# Altium PCB PCB1.PcbDoc
Units mm, origin at the board's own origin, x right, y up, seen from the top; angles counter-clockwise.
Board outline 121.03 x 115.95 mm, 2 copper layers (Top Layer, Bottom Layer); 55 components, 59 nets, 238 pads, 36 vias.
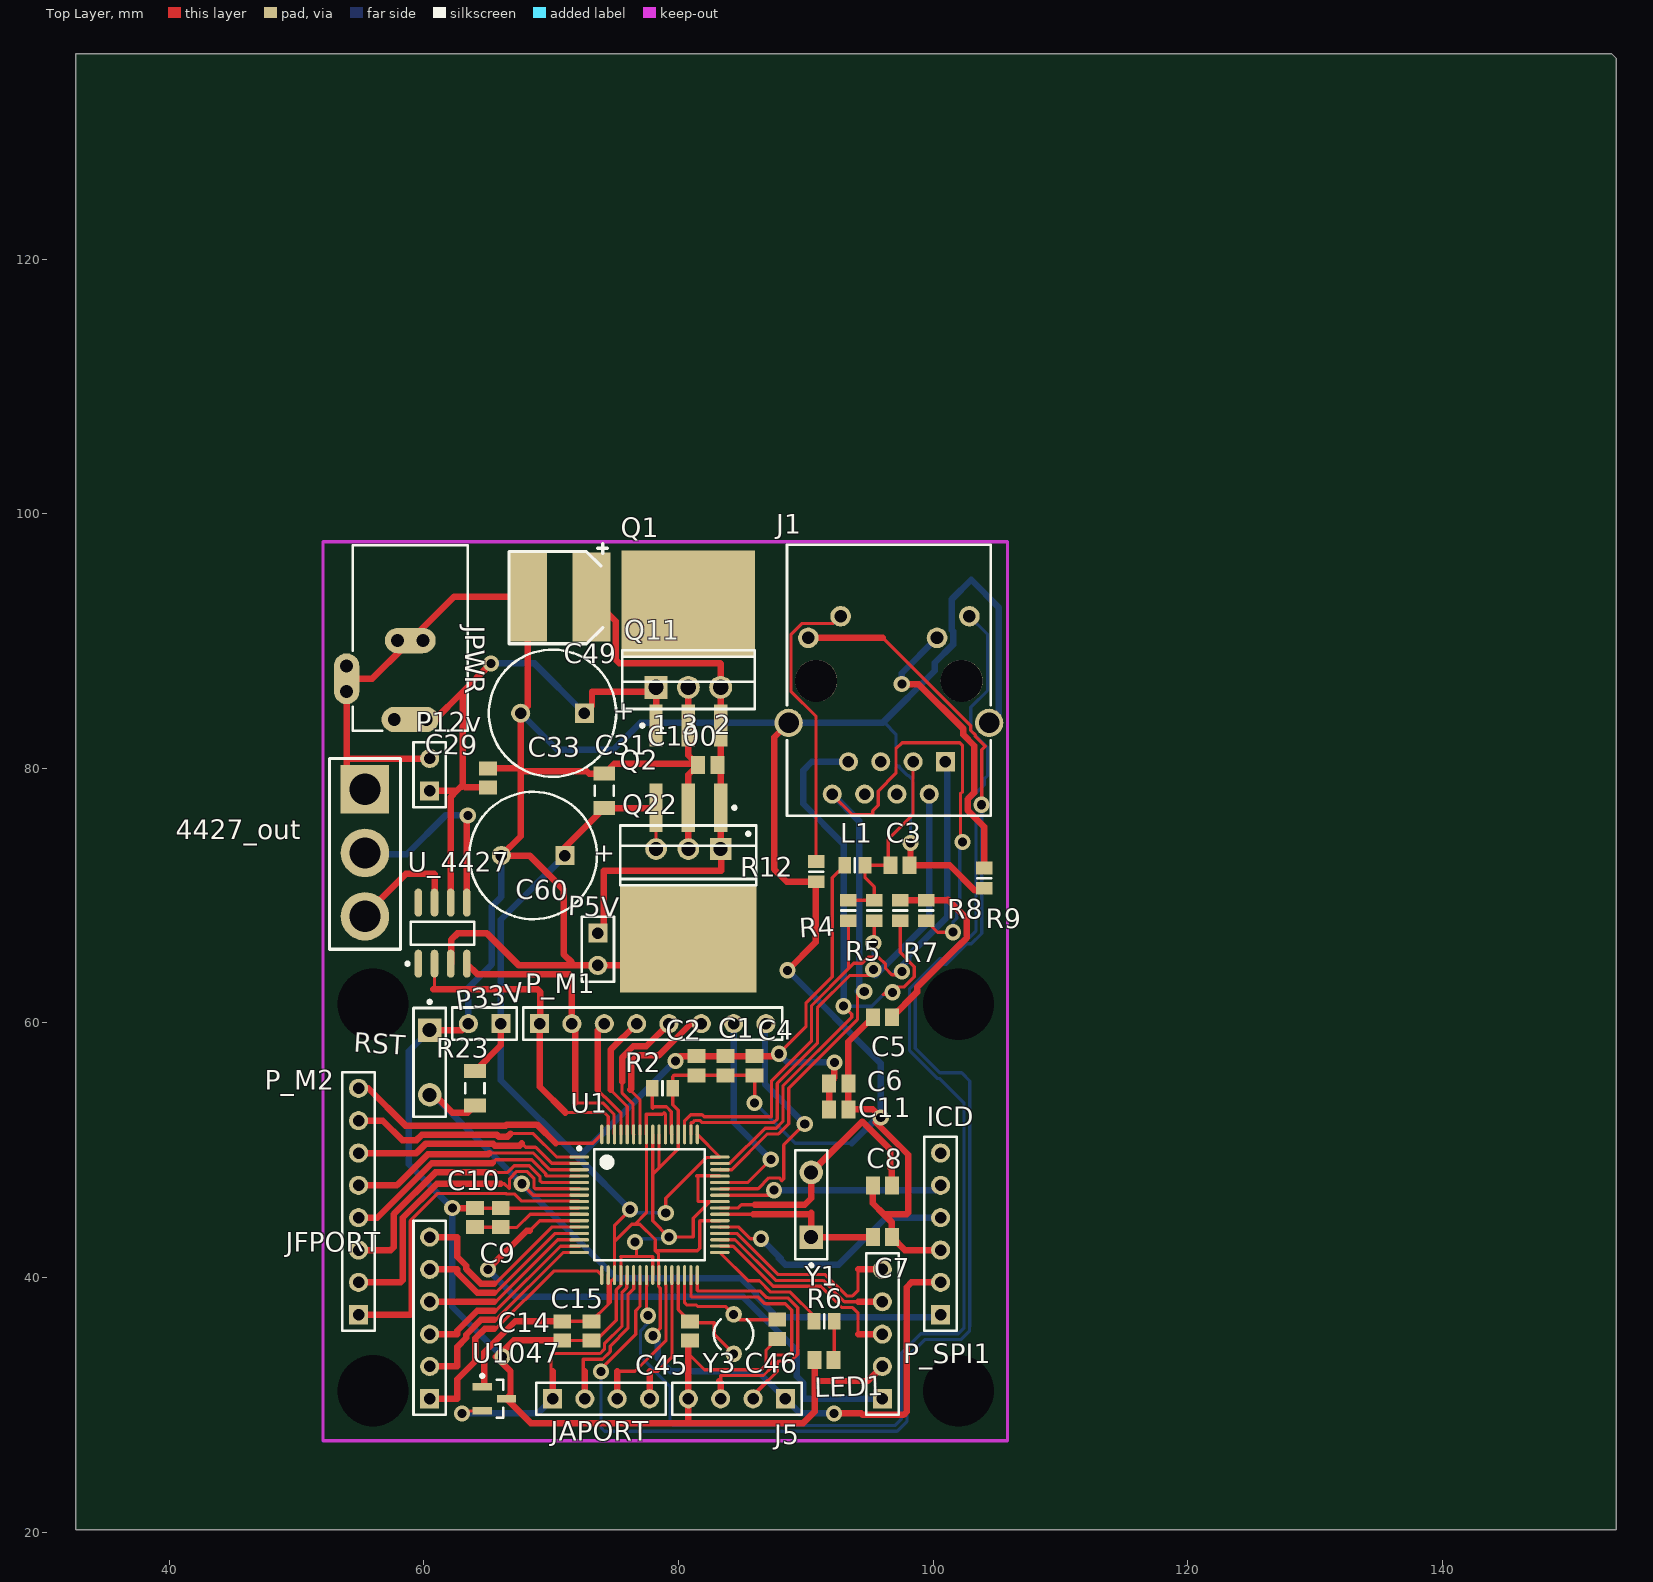
[diagram p0: Top Layer view]
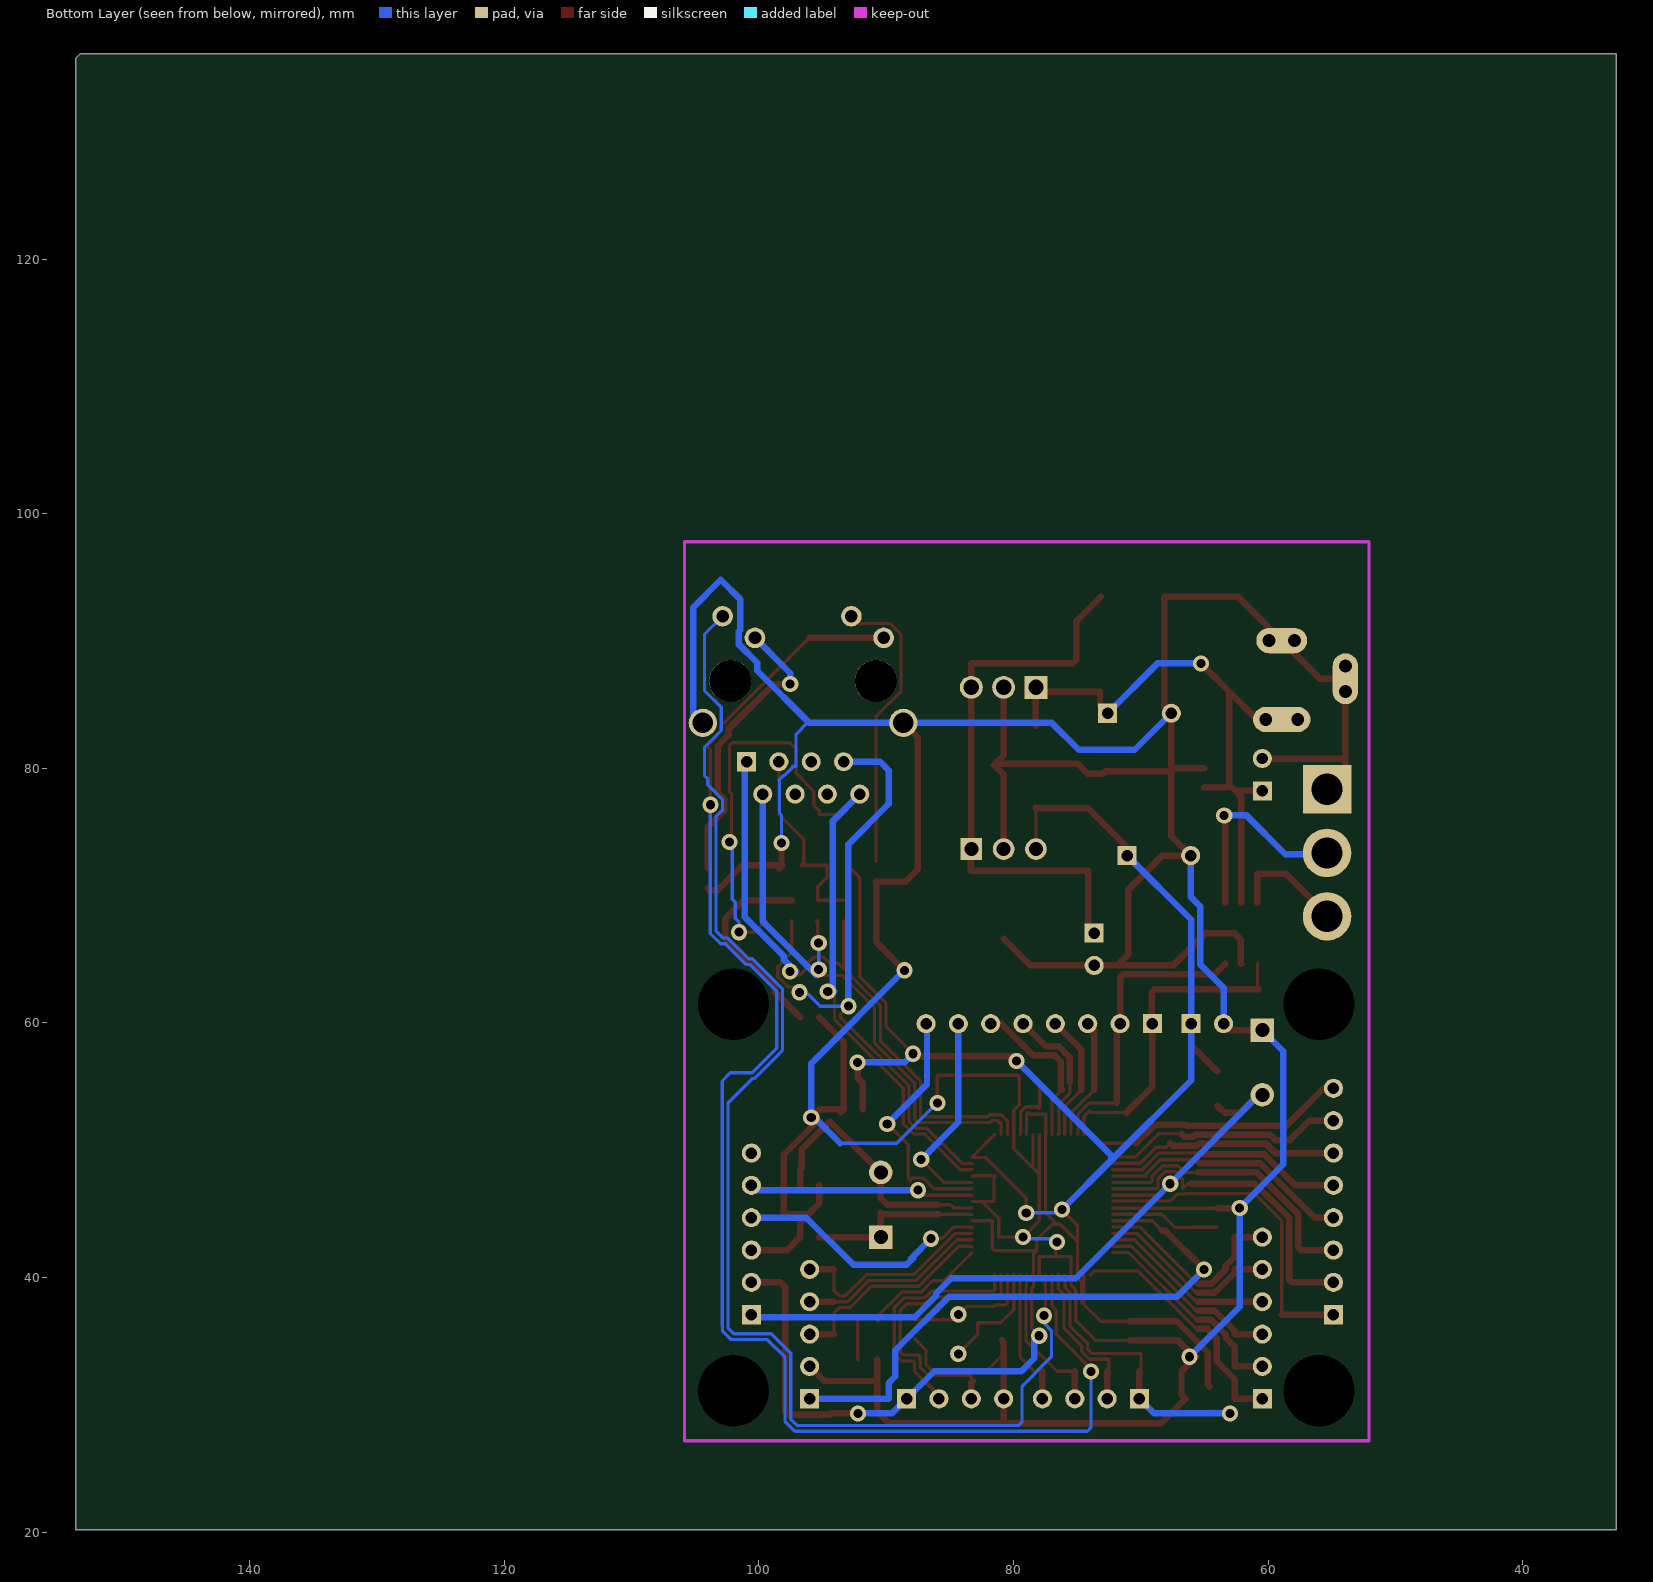
[diagram p1: Bottom Layer view, seen from below]

## Layer stack, top to bottom
Top Layer: signal copper 0.0356
Dielectric: dielectric 0.32, FR-4, Dk 4.8
Bottom Layer: signal copper 0.0356

## Board outline
32.639,136.144 32.639,20.193 153.67,20.193 153.67,135.763 153.289,136.144

## Design rules (kind name [scope] priority, off if disabled: settings)
AssemblyTestPointUsage [All] p1 off:
AssemblyTestpoint [All] p1 off: testpointundercomponent=TRUE minsize=1.016 maxsize=2.54 preferedsize=1.524 minholesize=0 maxholesize=1.016 preferedholesize=0.813 testpointgrid=0.025 usegrid=TRUE gridtolerance=0 allowsidetop=TRUE allowsidebottom=TRUE
Clearance [All] p1: gap=0.198
ComponentClearance [All] p1: gap=0.025 collisioncheckmode=3 verticalgap=0.025 showdistances=FALSE
FabricationTestPointUsage [All] p1 off: valid=0 allowmultiple=FALSE
FabricationTestpoint [All] p1 off: side=3 testpointundercomponent=TRUE minsize=1.016 maxsize=2.54 preferedsize=1.524 minholesize=0 maxholesize=1.016 preferedholesize=0.813 testpointgrid=0.025 allowsidetop=TRUE allowsidebottom=TRUE usegrid=TRUE gridtolerance=0
HoleSize [All] p1: absolutevalues=TRUE maxlimit=5.08 minlimit=0.025 maxpercent=80.000 minpercent=20.000
MinimumSolderMaskSliver [All] p1: minsoldermaskwidth=0.178
PolygonConnect [All] p1: connectstyle=Relief reliefconductorwidth=0.254 reliefentries=4 polygonreliefangle="90 Angle"
RoomDefinition Sheet_MAGJACK [InComponentClass('Sheet_MAGJACK')] p1: confinementstyle=ConfineIn formatcopy=TRUE lockcomponents=FALSE outline 116.84,95.631 121.412,95.631 121.412,104.267 116.84,104.267
RoomDefinition Sheet1 [InComponentClass('Sheet1')] p2: confinementstyle=ConfineIn formatcopy=TRUE lockcomponents=FALSE outline 115.189,38.989 122.301,38.989 122.301,53.721 115.189,53.721
RoutingVias [All] p1: holewidth=0.711 width=1.27 viastyle="Through Hole" minholewidth=0.711 minwidth=1.27 maxholewidth=0.711 maxwidth=1.27
SMDNeckDown [All] p1: percent=105.000
SilkToSilkClearance [All] p1 off: silktosilkclearance=0.254
SilkscreenOverComponentPads [All] p1: minsilkscreentomaskgap=0.254
SolderMaskExpansion [All] p1: expansion=0.102
Width [All] p1: maxlimit=0.508 minlimit=0.254 preferedwidth=0.305
19 further rules are at their usual default settings.

## Classes and differential pairs
component class Sheet1: C1 C2 C4 C6 C7 C8 C9 C10 C11 C14 C15 C45 C46 ICD J5 P_SPI1 R2 R23 RST U1 Y1 Y3
component class Sheet_MAGJACK: 4427_out C3 C5 C29 C31 C33 C49 C60 C100 J1 JAPORT JFPORT JPWR L1 LED1 P5V P12v P33V P_M1 P_M2 Q1 Q2 Q11 Q22 R4 R5 R6 R7 R8 R9 R12 U1047 U_4427

## Components (designator, comment, footprint, x,y, rotation, side; value= is the part's Value field where it differs from the comment)
4427_out "Header 3" BIG4 55.372,77.978 r90 top
C1 "0.1uF" CAPC2012L 83.693,56.642 r90 top
C2 "0.1uF" CAPC2012L 81.407,56.642 r90 top
C3 "0.1uF" CAPC2012L 97.409,72.39 r0 top
C4 "0.1uF" CAPC2012L 85.979,56.642 r90 top
C5 "0.1uF" CAPC2012L 96.012,60.452 r0 top
C6 "0.1uF" CAPC2012L 92.583,55.245 r180 top
C7 "33pF" CAPC2012L 96.012,43.18 r180 top
C8 "33pF" CAPC2012L 96.012,47.244 r0 top
C9 "1uF" CAPC2012L 66.04,44.704 r270 top
C10 "0.1uF" CAPC2012L 64.008,44.704 r270 top
C11 "0.1uF" CAPC2012L 92.583,53.213 r180 top
C14 "0.1uF" CAPC2012L 70.866,35.814 r90 top
C15 "0.1uF" CAPC2012L 73.152,35.814 r90 top
C29 "0.1uF" CAPC2012L 65.024,79.248 r270 top
C31 "2.2uF" CAPC3216L 74.168,78.232 r270 top
C33 "220mF" CAPPR5-10x12.5 70.104,84.328 r180 top
C45 "22pF" CAPC2012L 80.899,35.814 r90 top
C46 "22pF" CAPC2012L 87.757,35.941 r90 top
C49 "47uF" NSOALUMB 73.152,93.472 r180 top
C60 "220mF" CAPPR5-10x12.5 68.58,73.152 r180 top
C100 "0.1uF" CAPC2012L 82.296,80.264 r0 top
ICD "Header 6" HDR1X6 100.584,37.084 r90 top
J1 "LU1T516-43LF" CON_RJ45_RA_LEDS 96.52,86.868 r0 top
J5 "Header 4" HDR1X4 88.392,30.48 r180 top
JAPORT "Header 4" HDR1X4 70.104,30.48 r0 top
JFPORT "Header 6" HDR1X6 60.452,30.48 r90 top
JPWR "PWR2.5" KLD-0202 58.928,97.536 r270 top
L1 "330" RESC2012L 93.853,72.39 r0 top
LED1 "LED2" CAPC2012L 91.44,33.528 r180 top
P5V "Header 2" HDR1X2 73.66,67.056 r270 top
P12v "Header 2" HDR1X2 60.452,78.232 r90 top
P33V "Header 2" HDR1X2 66.04,59.944 r180 top
P_M1 "Header 8" HDR1X8 69.088,59.944 r0 top
P_M2 "Header 8" HDR1X8 54.864,37.084 r90 top
P_SPI1 "Header 5" HDR1X5 96.012,30.48 r90 top
Q1 "LM2940S-5.0" TS3B_N 80.772,89.408 r90 top
Q2 "TC1262-3.3VEB" DDPAK-EB3_N 80.772,70.612 r270 top
Q11 "L7805CP" ISOWATT220AB 80.772,86.36 r0 top
Q22 "TC1262-3.3VAB" TO-220-AB3 80.772,73.66 r180 top
R2 "2.26K 1%" RESC2012L 78.74,54.864 r180 top
R4 "49.9" RESC2012L 93.345,68.834 r270 top
R5 "49.9" RESC2012L 95.377,68.834 r270 top
R6 "180" RESC2012L 91.44,36.576 r0 top
R7 "49.9" RESC2012L 97.409,68.834 r270 top
R8 "49.9" RESC2012L 99.441,68.834 r270 top
R9 "180" RESC2012L 104.013,71.374 r90 top
R12 "180" RESC2012L 90.805,71.882 r270 top
R23 "10K" RESC3216L 64.008,54.864 r90 top
RST "SW-PB" SPST-2 60.452,56.896 r270 top
U1 "PIC18F67J60-I/PT" TQFP-PT64_L 77.724,45.72 r0 top
U1047 "TC1047AVNBTR" SOT-23-NB3_N 65.532,30.48 r0 top
U_4427 "TC4427AEOA" SOIC-OA8_N 61.468,67.056 r90 top
Y1 "25MHz" SPST-2 90.424,45.72 r90 top
Y3 "32KHz" BCY-W2/D3.1 84.328,35.56 r0 top

## Footprints (in the part's own frame and the unit in brackets; to place one, negate y for a bottom-side part, rotate by r counter-clockwise, add the part's x,y. Pads: shape width x height; smd on the part's side, far side on the other; paste and mask are expansions set on the pad)
BCY-W2/D3.1 [mm] "Crystal, Thru-Hole; 2 Leads; Body 3.1 x 8.2 mm (Dia.xH)"
  round 1.3 hole 0.7: 1(0,1.55) 2(0,-1.55)
  silkscreen extent -1.55,-1.19 1.55,1.17
BIG4 [mil]
  rect 150x150 hole 97: 1(15,0)
  round 150 hole 97: 2(-182,0) 3(-378,0)
  silkscreen extent -480,-110 110,110
CAPC2012L [mm] "Chip Capacitor, Body 2.0x1.3mm, IPC High Density"
  rect 1.1x1.4 smd: 1(-0.75,0) 2(0.75,0)
  body extent -1.1,-0.72 1.1,0.72, height 1.4
CAPC3216L [mm] "Chip Capacitor, Body 3.2x1.6mm, IPC High Density"
  rect 1.1x1.7 smd: 1(-1.35,0) 2(1.35,0)
  silkscreen extent -0.4,-0.75 0.4,0.75, body extent -1.7,-0.9 1.7,0.9, height 1.3
CAPPR5-10x12.5 [mm] "Capacitor, Electrolytic, Radial; Body 10 x 12.5 mm (Dia.xH typ); Pin Spacing 5 mm (typ)"
  rect 1.5x1.5 hole 0.9: 1(-2.5,0)
  round 1.5 hole 0.9: 2(2.5,0)
  silkscreen extent -5,-5 5,5
CON_RJ45_RA_LEDS [mm]
  rect 1.5x1.5 hole 0.9: 1(4.445,-6.35)
  round 1.5 hole 0.9: 2(3.175,-8.89) 3(1.905,-6.35) 4(0.635,-8.89) 5(-0.635,-6.35) 6(-1.905,-8.89) 7(-3.175,-6.35) 8(-4.445,-8.89)
  round 1.62 hole 1: 9(6.325,5.08) 10(3.785,3.38) 11(-3.785,5.08) 12(-6.325,3.38)
  round 2.23 hole 1.6: MH1(7.875,-3.3) MH2(-7.875,-3.3)
  round 3.3 hole 3.3 unplated: MH3(5.715,0) MH4(-5.715,0)
  silkscreen extent -8,-10.6 8,10.7
DDPAK-EB3_N [mm] "D2-PAK, 4-Leads, Body 9x10.2mm, Pitch 2.54mm, Lead Span 14.9mm, IPC Medium Density"
  rect 3.8x1.05 smd: 1(-6.3,2.54) 2(-6.3,0) 3(-6.3,-2.54)
  rect 8.4x10.7 smd: 4(4,0)
  silkscreen extent -6.42,-5.35 -0.6,5.35, body extent -3.3,-5.33 6.35,5.33, height 4.83
HDR1X2 [mm] "Connector; Header; 2 Position"
  rect 1.5x1.5 hole 0.9: 1(0,0)
  round 1.5 hole 0.9: 2(2.54,0)
  silkscreen extent -1.27,-1.27 3.81,1.27
HDR1X4 [mm] "Connector; Header; 4 Position"
  rect 1.5x1.5 hole 0.9: 1(0,0)
  round 1.5 hole 0.9: 2(2.54,0) 3(5.08,0) 4(7.62,0)
  silkscreen extent -1.27,-1.27 8.89,1.27
HDR1X5 [mm] "Connector; Header; 5 Position"
  rect 1.5x1.5 hole 0.9: 1(0,0)
  round 1.5 hole 0.9: 2(2.54,0) 3(5.08,0) 4(7.62,0) 5(10.16,0)
  silkscreen extent -1.27,-1.27 11.43,1.27
HDR1X6 [mm] "Connector; Header; 6 Position"
  rect 1.5x1.5 hole 0.9: 1(0,0)
  round 1.5 hole 0.9: 2(2.54,0) 3(5.08,0) 4(7.62,0) 5(10.16,0) 6(12.7,0)
  silkscreen extent -1.27,-1.27 13.97,1.27
HDR1X8 [mm] "Connector; Header; 8 Position"
  rect 1.5x1.5 hole 0.9: 1(0,0)
  round 1.5 hole 0.9: 2(2.54,0) 3(5.08,0) 4(7.62,0) 5(10.16,0) 6(12.7,0) 7(15.24,0) 8(17.78,0)
  silkscreen extent -1.27,-1.27 19.05,1.27
ISOWATT220AB [mm] "TO, Thru-Hole, Vertical, Heatsink Mounted; 3 In-Line Leads; Pitch 2.54 mm; Pin sequence 1, 3, 2"
  rect 1.8x1.8 hole 1.2: 1(-2.54,0)
  round 1.8 hole 1.2: 2(2.54,0) 3(0,0)
  silkscreen extent -5.2,-1.7 5.2,2.9
KLD-0202 [mm]
  oval 2x4.5 all layers, no hole: 1(13.7,0)
  round 1.5 hole 1: 1A(13.7,-1.25) 1B(13.7,1.25) 2A(7.5,-1) 2B(7.5,1) 3A(9.5,-5) 3B(11.5,-5)
  oval 2x4 all layers, no hole: 2(7.5,0)
  oval 4x2 all layers, no hole: 3(10.5,-5)
  silkscreen extent 0,-4.5 14.6,4.5
NSOALUMB [mm]
  rect 3x7 smd: 1(0,0) 2(5,0)
  silkscreen extent -1.27,-4.19 6.48,3.68
RESC2012L [mm] "Chip Resistor, Body 2.0x1.3mm, IPC High Density"
  rect 1x1.3 smd: 1(-0.8,0) 2(0.8,0)
  silkscreen extent 0,-0.55 0,0.55, body extent -1.07,-0.7 1.07,0.7, height 2.54
RESC3216L [mm] "Chip Resistor, Body 3.1x1.6mm, IPC High Density"
  rect 1.1x1.7 smd: 1(-1.35,0) 2(1.35,0)
  silkscreen extent -0.4,-0.75 0.4,0.75, body extent -1.68,-0.87 1.68,0.87, height 2.54
SOIC-OA8_N [mm] "SOIC, 8-Leads, Body 4.9x3.9mm, Pitch 1.27mm, IPC Medium Density"
  oval 2.2x0.6 smd: 1(-2.4,1.905) 2(-2.4,0.635) 3(-2.4,-0.635) 4(-2.4,-1.905) 5(2.4,-1.905) 6(2.4,-0.635) 7(2.4,0.635) 8(2.4,1.905)
  silkscreen extent -2.52,-2.5 0.9,2.88, body extent -2,-2.5 2,2.5, height 1.75
SOT-23-NB3_N [mm] "SOT23, 3-Leads, Body 2.9x1.3mm, Pitch 0.95mm, Lead Span 2.4mm, IPC Medium Density"
  rect 1.5x0.6 smd: 1(-0.95,0.95) 2(-0.95,-0.95) 3(0.95,0)
  silkscreen extent -1.07,-1.5 0.7,1.92, body extent -0.7,-1.5 0.7,1.5, height 1.12
SPST-2 [mm] "Circuit Breaker; 2 Leads"
  rect 1.85x1.85 hole 1.1: 1(-2.54,0)
  round 1.85 hole 1.1: 2(2.54,0)
  silkscreen extent -4.89,-1.27 4.28,1.27
TO-220-AB3 [mm] "TO, Thru-Hole, Vertical, Heatsink Mounted; 3 In-Line Leads; Pitch 2.54 mm"
  rect 1.7x1.7 hole 1.1: 1(-2.54,0)
  round 1.7 hole 1.1: 2(0,0) 3(2.54,0)
  silkscreen extent -5.35,-1.85 5.35,2.85, body extent -5.4,-1.9 5.4,2.9, height 22.9
TQFP-PT64_L [mm] "Thin QFP, 64-Leads, Body 10x10mm, Pitch 0.5mm, IPC High Density"
  oval 1.55x0.25 smd: 1(-5.525,3.75) 2(-5.525,3.25) 3(-5.525,2.75) 4(-5.525,2.25) 5(-5.525,1.75) 6(-5.525,1.25) 7(-5.525,0.75) 8(-5.525,0.25) 9(-5.525,-0.25) 10(-5.525,-0.75) 11(-5.525,-1.25) 12(-5.525,-1.75) 13(-5.525,-2.25) 14(-5.525,-2.75) 15(-5.525,-3.25) 16(-5.525,-3.75) 33(5.525,-3.75) 34(5.525,-3.25) 35(5.525,-2.75) 36(5.525,-2.25) 37(5.525,-1.75) 38(5.525,-1.25) 39(5.525,-0.75) 40(5.525,-0.25) 41(5.525,0.25) 42(5.525,0.75) 43(5.525,1.25) 44(5.525,1.75) 45(5.525,2.25) 46(5.525,2.75) 47(5.525,3.25) 48(5.525,3.75)
  oval 0.25x1.55 smd: 17(-3.75,-5.525) 18(-3.25,-5.525) 19(-2.75,-5.525) 20(-2.25,-5.525) 21(-1.75,-5.525) 22(-1.25,-5.525) 23(-0.75,-5.525) 24(-0.25,-5.525) 25(0.25,-5.525) 26(0.75,-5.525) 27(1.25,-5.525) 28(1.75,-5.525) 29(2.25,-5.525) 30(2.75,-5.525) 31(3.25,-5.525) 32(3.75,-5.525) 49(3.75,5.525) 50(3.25,5.525) 51(2.75,5.525) 52(2.25,5.525) 53(1.75,5.525) 54(1.25,5.525) 55(0.75,5.525) 56(0.25,5.525) 57(-0.25,5.525) 58(-0.75,5.525) 59(-1.25,5.525) 60(-1.75,5.525) 61(-2.25,5.525) 62(-2.75,5.525) 63(-3.25,5.525) 64(-3.75,5.525)
  silkscreen extent -5.65,-4.35 4.35,4.55, body extent -5,-5 5,5, height 1.2
TS3B_N [mm] "D2-PAK, 4-Leads, Body 8.6x10.2mm, Pitch 2.54mm, Lead Span 14.2mm, IPC Medium Density"
  rect 3.3x1.05 smd: 1(-6.05,2.54) 2(-6.05,0) 3(-6.05,-2.54)
  rect 8.4x10.5 smd: 4(3.5,0)
  silkscreen extent -6.17,-5.2 -1.1,5.2, body extent -2.6,-5.2 6.29,5.2, height 4.64

## Part data
4427_out: "Header, 3-Pin"
C1 C45 C46 C100: library part "Cap Semi", "Capacitor (Semiconductor SIM Model)"
C2 C3 C4 C5 C6 C7 C8 C9 C10 C11 C14 C15 C29 C31: library part Cap, "Capacitor"
C33 C49 C60: library part "Cap Pol1", "Polarized Capacitor (Radial)"
ICD JFPORT: "Header, 6-Pin"
J1: library part Component_1
J5 JAPORT: "Header, 4-Pin"
JPWR: "DC Power Jack, 2.5mm, KLD Series, PCB Mount"
L1: library part "Inductor Iron", "Magnetic-Core Inductor"
LED1: "Typical RED, GREEN, YELLOW, AMBER GaAs LED"
P5V P12v P33V: "Header, 2-Pin"
P_M1 P_M2: "Header, 8-Pin"
P_SPI1: "Header, 5-Pin"
Q1: "1A Low Dropout Regulator"
Q2: "500mA Fixed Output CMOS LDO, 3-Pin DDPAK, Extended Temperature"
Q11: "Positive Voltage Regulator"
Q22: "500mA Fixed Output CMOS LDO, 3-Pin TO-220, Extended Temperature"
R2 R4 R5 R7 R8 R9 R12: library part Res2, "Resistor"
R6 R23: library part "Res Semi", "Semiconductor Resistor"
RST: "Switch"
U1: "High Performance, 1-Mbit Flash Microcontroller with Ethernet, 128K Flash, 64-Pin TQFP, Industrial Temperature Range"
U1047: "Precision Temperature-to-Voltage Converter, 3-Pin SOT-23, Extended Temperature, Tape and Reel"
U_4427: "1.5A Dual High-Speed Power MOSFET Driver, Non-Inverting, Industrial Temperature"
Y1 Y3: library part XTAL, "Crystal Oscillator"

## Free pads (board coordinates)
  round 1.524 hole 5.588: 0(56.007,31.115) 0(56.007,61.468) 0(101.981,31.115) 0(101.981,61.468)

## Via types
v1: diameter 1.27, hole 0.711, Top Layer to Bottom Layer, 36 vias

## Nets (pads, with @x,y where several pads share a name; then routed paths per layer and width w, separated by ;. In a path a pad name is that pad's centre, name@x,y a point inside that pad or via, vN(x,y) a via of type N, cw(c..) or ccw(c..) an arc to the next point about the centre after c; other vN are vias at no path point)
+3.3: C1.2 C2.2 C4.2 C6.2 C11.2 C14.2 C15.2 C31.2 C60.1 ICD.2 J5.1 L1.1 P33V.1 Q2.3 Q22.3 R23.2 U1.18 U1.19 U1.26 U1.38 U1.48 U1.49 U1.54 U1.57 U1047.1 | length 201.6
  Top Layer w0.254: C14.2@70.727,36.703 C14.2 C15.2 74.474,37.886 ; U1.18 74.474,37.886 ; 74.827,39.842 74.651,39.665 ; v1(76.2,45.339) 74.981,44.12 74.981,42.85 ; v1(77.978,35.433) 78.562,36.017 78.562,39.166 78.435,39.293 ; Q2.3@78.202,76.882 78.232,76.852 Q22.3 ; U1.26 U1.26@78.435,40.234 ; U1.54 78.974,52.852 78.867,52.959 78.74,52.832 77.47,52.832 77.47,51.249 U1.57 77.474,45.089 76.581,44.196 ; v1(78.994,45.085) 78.994,46.24 82.182,49.427 83.206,49.427 U1.48 U1.49 ; U1.38 81.681,44.47 81.661,44.45 81.661,42.291 81.483,42.113 78.167,42.113 ; v1(87.884,57.582) 90.002,59.7 90.002,61.559 92.075,63.631 92.075,71.412 L1.1 ; 74.474,37.886 74.651,38.063 74.651,39.665 ; 74.651,39.665 74.974,39.988 U1.19 74.981,40.202 74.981,42.85 ; 74.981,42.85 76.327,44.196 76.581,44.196 ; 76.581,44.196 76.962,44.196 78.167,42.991 78.167,42.113 ; 78.167,42.113 78.435,41.845 U1.26@78.435,40.234 ; 78.435,39.293 78.435,40.195 U1.26@78.435,40.234 ; 78.435,39.293 U1.26@78.435,40.234
  Top Layer w0.508: R23.2 66.04,58.246 P33V.1 ; U1047.1 64.745,31.593 64.745,34.138 67.171,36.564 C14.2 ; C60.1 71.08,73.794 C31.2 78.202,76.882 Q2.3 ; v1(79.756,57.023) 80.125,57.392 C2.2 C1.2 C4.2 87.364,57.392 87.554,57.582 v1(87.884,57.582) ; C11.2 C6.2 91.821,55.257 92.246,55.682 v1(92.246,56.897) ; v1(92.202,29.337) 94.361,29.337 94.488,29.21 97.663,29.21 97.917,29.464 97.917,39.243 98.298,39.624 ICD.2
  Bottom Layer w0.254: v1(76.2,45.339) 76.454,45.085 v1(78.994,45.085) ; v1(77.978,35.433) v1@78.359,35.052
  Bottom Layer w0.508: C60.1 66.04,68.112 P33V.1 66.04,55.499 72.304,49.235 ; v1(76.2,45.339) 72.304,49.235 ; v1@78.359,35.052 78.359,33.655 79.375,32.639 86.233,32.639 J5.1 89.535,29.337 v1(92.202,29.337) ; v1(79.756,57.023) 72.304,49.571 72.304,49.235 ; v1(87.884,57.582) 88.544,56.921 92.222,56.921 v1(92.246,56.897)
+12: C29.2 C33.1 JPWR.1 JPWR.1A JPWR.1B P12v.1 Q1.1 Q11.1 U_4427.6 | length 48.3
  Top Layer w0.508: JPWR.1 JPWR.1B 60.874,83.836 62.968,85.93 ; P12v.1 62.586,78.232 ; U_4427.6 62.103,77.749 62.586,78.232 ; C29.2 63.234,78.498 63.043,78.689 ; v1(65.278,88.24) 62.968,85.93 ; C33.1 73.203,84.927 73.203,86.004 77.978,86.004 Q11.1@78.232,85.75 ; Q1.1 Q11.1 ; 62.586,78.232 63.043,78.689 ; 62.968,85.93 63.043,85.855 63.043,78.689
  Bottom Layer w0.508: v1(65.278,88.24) 68.692,88.24 C33.1
GND: 4427_out.1 C1.1 C2.1 C3.2 C4.1 C5.1 C6.1 C7.1 C8.1 C9.1 C10.1 C11.1 C14.1 C15.1 C29.1 C31.1 C33.2 C45.1 C46.1 C49.2 C60.2 C100.1 ICD.3 J1.MH1 J1.MH2 J5.4 JPWR.2 JPWR.2A JPWR.2B JPWR.3 JPWR.3A JPWR.3B LED1.2 P5V.2 P12v.2 P33V.2 P_SPI1.2 Q1.2 Q2.2 Q2.4 Q11.3 Q22.2 R2.1 R9.1 R12.2 RST.1 U1.9 U1.20 U1.25 U1.41 U1.45 U1.52 U1.55 U1.56 U1047.3 U_4427.3 | length 449
  Top Layer w0.254: v1(62.23,45.466) v1@62.242,45.454 ; C10.1 C9.1 72.183,45.454 U1.9 ; C14.1 C15.1 73.533,35.064 75.108,36.638 75.108,39.035 75.474,39.401 U1.20 75.474,41.62 ; 75.438,41.656 76.708,41.656 ; v1@76.708,42.672 76.708,41.656 ; U1.25 77.978,40.199 77.978,41.656 76.708,41.656 ; U1.56 77.974,48.133 ; U1.55 78.474,48.633 ; 80.899,33.909 82.042,32.766 86.487,32.766 86.868,33.147 86.868,34.302 C46.1 ; 82.41,45.925 81.153,44.668 81.153,43.18 v1(79.248,43.18) 77.974,44.454 77.974,48.133 ; U1.41@83.245,45.974 81.534,45.974 81.534,47.879 81.407,48.006 83.213,48.006 U1.45 ; v1(85.979,53.721) C4.1 C1.1 C2.1 79.641,55.892 79.54,55.791 R2.1 79.54,53.579 79.974,53.145 U1.52 79.974,50.133 78.474,48.633 ; 77.974,48.133 78.474,48.633
  Top Layer w0.508: 4427_out.1 53.928,79.803 53.928,80.899 ; JPWR.2A@58.428,89.536 55.928,87.036 JPWR.3 JPWR.3B 53.928,80.899 ; JPWR.2 62.364,93.472 C49.2 68.152,84.876 C33.2 67.604,79.756 ; RST.1 62.992,59.436 P33V.2 ; P12v.2 54.055,80.772 53.928,80.899 ; U_4427.3 62.154,64.707 62.154,66.548 62.636,67.031 64.948,67.031 67.462,64.516 P5V.2 ; v1@62.242,45.454 C10.1 ; C29.1 67.362,79.998 ; C14.1 67.068,35.064 65.786,33.782 65.659,33.782 66.802,32.639 66.802,30.8 U1047.3 68.387,28.575 80.899,28.575 ; 71.628,64.745 70.968,65.405 70.968,70.485 68.301,73.152 C60.2 67.604,74.676 67.604,79.756 ; 72.796,79.756 67.604,79.756 ; 72.97,79.582 C31.1 74.952,80.366 C100.1@81.444,80.366 ; P5V.2@73.431,64.745 P5V.2 ; Q2.4 78.676,64.516 P5V.2 ; Q22.2 Q2.2 80.772,79.49 C100.1 C100.1@81.444,80.366 ; Q11.3 Q1.2 80.772,81.038 C100.1@81.444,80.366 ; C45.1 80.772,34.937 J5.4 80.772,28.702 80.899,28.575 ; v1(88.57,64.135) 90.767,66.332 R12.2@90.767,71.082 ; J1.MH2 87.528,82.451 87.528,72.06 88.506,71.082 R12.2@90.767,71.082 ; LED1.2 90.69,31.877 ; C11.1@93.574,52.972 C11.1 ; C8.1 95.262,45.835 96.139,44.958 ; C5.1 93.333,58.523 C6.1 C11.1 ; v1@95.499,52.192 98.044,49.647 98.044,45.085 ; v1(95.885,52.578) 95.25,53.213 C11.1 ; P_SPI1.2 94.869,31.877 90.69,31.877 ; 97.917,44.958 96.139,44.958 ; v1(98.222,74.143) 98.222,72.453 C3.2 ; C3.2@98.413,72.136 C3.2 ; ICD.3 97.778,42.164 C7.1 96.762,44.335 96.139,44.958 ; R9.1 103.848,70.409 103.276,70.409 101.295,72.39 C3.2 ; 80.899,28.575 89.789,28.575 90.69,29.476 90.69,31.877 ; R12.2@90.767,71.082 90.767,71.12 R12.2 R12.2@90.767,71.082
  Bottom Layer w0.254: v1@76.835,43.053 v1@79.121,43.053 ; v1(85.979,53.721) 89.154,50.546 93.599,50.546 ; 96.027,83.568 96.188,83.568 97.079,82.677 97.079,80.162 97.333,80.162 97.35,80.145 97.35,80.073 97.98,79.443 98.052,79.443 98.425,79.07 98.374,79.019 98.374,76.454 98.222,76.302 v1(98.222,74.143)
  Bottom Layer w0.508: RST.1 58.801,57.785 58.801,48.895 v1(62.23,45.466) 62.23,37.719 v1(66.167,33.782) ; P33V.2 63.5,62.763 65.334,64.597 65.334,69.151 66.08,69.897 C60.2 ; C33.2 70.474,81.458 74.879,81.458 76.989,83.568 J1.MH2 96.027,83.568 100.133,87.673 100.133,88.291 101.567,89.725 101.567,90.771 101.473,90.865 101.473,93.294 102.984,94.805 105.156,92.634 105.156,84.329 J1.MH1 ; v1(88.57,64.135) 95.885,56.82 v1(95.885,52.578) 95.631,52.578 93.599,50.546
  other v1: 76.581,42.799
Net4427_out_2: 4427_out.2 U_4427.5 | length 16.3
  Top Layer w0.508: U_4427.5 63.373,76.225 v1(63.449,76.302)
  Bottom Layer w0.508: 4427_out.2 55.474,73.254 58.649,73.254 61.697,76.302 v1(63.449,76.302)
Net4427_out_3: 4427_out.3 U_4427.7 | length 9.1
  Top Layer w0.508: 4427_out.3 55.372,68.504 58.572,71.704 60.808,71.704 60.833,71.679 U_4427.7
NetC3_1: C3.1 J1.3 L1.2 R4.1 R5.1 | length 16.1
  Top Layer w0.254: R4.1 R5.1 95.377,70.688 94.653,71.412 L1.2 C3.1 96.469,72.58 96.469,74.447 98.425,76.403 J1.3
NetC5_2: C5.2 R7.1 R8.1 | length 16.8
  Top Layer w0.508: C5.2@97.282,60.972 C5.2 98.735,62.425 98.735,62.813 101.967,66.045 101.999,66.045 102.636,66.682 102.636,68.204 101.143,69.698 101.079,69.634 R8.1 R7.1
NetC7_2: C7.2 U1.39 Y1.1 | length 14
  Top Layer w0.254: U1.39 85.84,44.97 85.852,44.958
  Top Layer w0.508: 85.852,44.958 90.297,44.958 90.424,45.085 Y1.1 C7.2
NetC8_2: C8.2 U1.40 Y1.2 | length 21.2
  Top Layer w0.254: U1.40 84.688,45.47 84.938,45.72 85.979,45.72 ; Y1.2 Y1.2@90.805,48.641 ; 96.647,48.641 96.762,48.526
  Top Layer w0.508: 85.979,45.72 89.916,45.72 90.424,46.228 Y1.2 ; Y1.2@90.805,48.641 94.424,52.261 96.647,50.038 96.647,48.641 ; C8.2 96.762,48.526
NetC9_2: C9.2 C10.2 U1.10 | length 8.6
  Top Layer w0.254: C10.2 C9.2 66.052,43.942 67.31,43.942 68.338,44.97 U1.10
NetC45_2: C45.2 U1.29 Y3.2 | length 9
  Top Layer w0.254: U1.29 79.974,37.489 C45.2 81.014,36.449 82.804,36.449 82.804,35.534 Y3.2
NetC46_2: C46.2 U1.30 Y3.1 | length 10
  Top Layer w0.254: U1.30 80.474,38.017 80.645,37.846 81.407,37.846 81.534,37.719 83.719,37.719 Y3.1 84.747,36.691 C46.2
NetC49_1: C49.1 C100.2 P5V.1 Q1.3 Q2.1 Q11.2 Q22.1 | length 44.8
  Top Layer w0.508: C49.1 75.07,91.554 75.07,88.521 75.335,88.256 83.287,88.256 83.312,88.23 Q11.2 Q1.3 Q2.1 ; P5V.1 74.143,67.539 74.143,71.958 83.363,71.958 Q22.1@83.363,73.66 ; Q22.1 Q2.1 ; Q2.1@83.363,76.861 Q2.1
NetICD_1: ICD.1 R23.1 RST.2 U1.7 | length 56.8
  Top Layer w0.254: v1(67.691,47.371) 68.592,46.47 U1.7
  Top Layer w0.508: RST.2 60.833,54.356 62.23,52.959 63.453,52.959 R23.1
  Bottom Layer w0.508: RST.2 60.706,54.356 v1(67.691,47.371) 75.108,39.954 84.877,39.954 86.055,38.776 86.055,38.596 87.758,36.893 100.393,36.893 ICD.1
NetICD_4: ICD.4 U1.37 | length 20.4
  Top Layer w0.254: U1.37@83.292,43.927 U1.37 84.727,43.97 85.644,43.053 v1(86.487,43.053)
  Bottom Layer w0.508: v1(86.487,43.053) 88.011,41.529 87.884,41.529 88.392,41.021 92.583,41.021 96.266,44.704 ICD.4
NetICD_5: ICD.5 U1.42 | length 17.7
  Top Layer w0.254: U1.42 87.11,46.47 v1(87.503,46.863)
  Bottom Layer w0.508: v1(87.503,46.863) 100.203,46.863 ICD.5
NetJ1_1: J1.1 R4.2 U1.51 | length 50.9
  Top Layer w0.254: U1.51 80.474,52.311 80.96,52.797 81.848,52.797 82.006,52.639 87.3,52.639 87.3,55.436 90.454,58.591 90.454,61.371 93.345,64.262 ; R4.2@93.355,68.034 R4.2 93.345,64.262 ; v1(97.561,64.033) 97.333,64.033 97.079,63.779 96.76,63.779 96.261,64.279 96.261,64.609 95.698,65.171 94.903,65.171 94.421,64.689 93.772,64.689 93.345,64.262 ; J1.1@100.77,80.323 J1.1
  Bottom Layer w0.254: v1@97.079,64.02 97.079,63.779 97.333,64.033 v1(97.561,64.033) ; J1.1 J1.1@101.117,80.366
  Bottom Layer w0.508: v1@97.079,64.02 98.033,64.973 98.033,65.241 101.117,68.326 J1.1@101.117,80.366
NetJ1_2: J1.2 R5.2 U1.50 | length 45.5
  Top Layer w0.254: 80.974,52.039 U1.50 80.974,52.172 81.114,52.172 81.288,52.345 81.66,52.345 81.819,52.187 87.487,52.187 87.752,52.452 87.752,55.249 90.907,58.403 90.907,61.184 93.451,63.729 95.453,63.729 95.301,63.881 v1(95.301,64.211) ; v1(95.301,66.269) 95.377,66.345 R5.2 R5.2@95.479,67.932
  Bottom Layer w0.254: v1(95.301,66.269) 95.301,63.881 v1@95.453,63.729
  Bottom Layer w0.508: v1@95.453,63.729 99.695,67.97 J1.2
NetJ1_7: J1.7 R7.2 U1.47 | length 54.5
  Top Layer w0.254: U1.47 84.036,48.97 86.801,51.735 87.674,51.735 88.204,52.264 88.204,55.061 93.598,60.455 93.598,60.682 v1(92.964,61.316) ; v1(96.799,62.408) 96.647,62.408 96.469,62.23 96.088,62.23 96.677,62.819 97.705,62.819 98.522,63.636 98.522,64.431 97.409,65.544 R7.2
  Bottom Layer w0.254: v1(92.964,61.316) 95.174,61.316 96.088,62.23 96.469,62.23 96.647,62.408 v1(96.799,62.408)
  Bottom Layer w0.508: v1(92.964,61.316) 92.964,74.041 89.789,77.216 89.789,79.832 90.475,80.518 J1.7
NetJ1_8: J1.8 R8.2 U1.46 | length 69.7
  Top Layer w0.254: U1.46@83.292,48.513 U1.46 84.176,48.47 86.988,51.283 87.862,51.283 88.656,52.077 88.656,54.874 94.05,60.268 94.05,62.452 94.183,62.586 94.285,62.484 v1(94.59,62.484) ; J1.8 92.075,77.927 93.624,76.378 95.25,76.378 95.25,76.652 95.69,77.093 95.69,78.215 97.079,79.604 97.079,81.534 97.561,82.017 102.083,82.017 102.311,81.788 102.311,78.165 102.144,77.998 102.144,74.386 v1(102.311,74.219) ; R8.2@99.479,68.072 R8.2 100.343,67.132 v1(101.549,67.132)
  Bottom Layer w0.254: J1.8 J1.8@92.151,77.902 ; v1(101.549,67.132) 101.549,67.92 101.854,68.224 101.854,69.494 102.083,69.723 102.083,73.99 v1(102.311,74.219)
  Bottom Layer w0.508: J1.8 94.183,75.87 94.183,62.586 v1@94.082,62.484
NetJ1_9: J1.9 U1.24 | length 105.7
  Top Layer w0.254: v1@77.474,37.131 U1.24 77.517,40.152 77.517,39.358
  Bottom Layer w0.254: v1(77.597,37.008) 77.597,36.41 77.018,35.831 77.018,33.777 79.324,31.471 79.324,28.677 79.624,28.377 96.982,28.377 97.485,28.88 97.485,34.061 99.009,35.585 101.981,35.585 102.413,36.017 102.413,53.746 100.528,55.631 100.346,55.631 98.149,57.828 98.149,62.687 100.502,65.039 100.814,65.039 102.441,66.666 102.81,66.666 103.358,67.213 103.358,76.234 102.85,76.742 102.85,77.537 104.013,78.701 104.013,79.172 104.267,79.426 104.267,81.659 102.955,82.971 102.955,84.795 104.267,86.107 104.267,90.526 J1.9
NetJ1_10: J1.10 R9.2 | length 23.1
  Top Layer w0.508: v1(97.536,86.614) 98.857,86.614 102.376,83.095 102.376,82.632 103.231,81.777 103.231,78.098 102.723,77.59 102.723,76.69 104.013,75.399 R9.2
  Bottom Layer w0.508: v1(97.536,86.614) 97.536,87.479 J1.10
NetJ1_11: J1.11 R12.1 | length 23.1
  Top Layer w0.254: R12.1 90.805,84.075 88.83,86.05 88.83,90.488 89.725,91.383 92.17,91.383 J1.11
NetJ1_12: J1.12 U1.23 | length 117.6
  Top Layer w0.254: v1(73.914,32.614) 73.914,32.823 76.637,35.546 76.637,37.405 76.974,37.743 U1.23 ; 96.042,90.248 102.955,83.335 102.955,82.971 103.302,82.625 103.302,82.525 104.089,81.737 103.81,81.458 v1(103.81,77.14)
  Top Layer w0.508: J1.12 96.042,90.248
  Bottom Layer w0.254: v1(73.914,32.614) 73.914,28.194 74.183,27.925 97.17,27.925 97.937,28.693 97.937,33.726 99.344,35.133 102.168,35.133 102.865,35.83 102.865,36.165 102.87,36.17 102.87,55.443 102.23,56.083 100.533,56.083 98.602,58.015 98.602,62.5 100.689,64.587 101.001,64.587 102.628,66.214 102.998,66.214 103.81,67.026 v1(103.81,77.14)
NetJ5_2: J5.2 U1.32 | length 18.8
  Top Layer w0.254: U1.32 81.474,38.998 81.534,38.938 86.422,38.938 86.93,38.43 87.034,38.43 87.06,38.405 88.584,38.405 89.357,37.631 89.357,33.974 88.835,33.452 87.884,33.452 87.782,33.35 87.782,32.664 86.995,31.877
  Top Layer w0.305: J5.2 85.852,30.734 86.995,31.877
NetJ5_3: J5.3 U1.31 | length 22.1
  Top Layer w0.254: U1.31 80.974,38.533 81.026,38.481 86.233,38.481 86.741,37.973 86.845,37.973 86.87,37.948 88.394,37.948 88.9,37.442 88.9,34.163 88.646,33.909 87.452,33.909 87.325,33.782 87.325,32.958 86.676,32.309 83.312,32.309 83.312,32.004 83.185,31.877
  Top Layer w0.508: 83.185,31.877 83.312,31.75 J5.3
NetJAPORT_1: JAPORT.1 U1.21 U1047.2 | length 23.8
  Top Layer w0.254: v1(62.992,29.337) 63.185,29.53 U1047.2 ; 70.104,32.639 69.977,32.766 69.977,34.036 73.841,34.036 74.182,34.377 74.182,34.812 75.565,36.195 75.565,38.846 75.931,39.212 75.931,40.152 U1.21
  Top Layer w0.508: JAPORT.1 70.104,32.639
  Bottom Layer w0.508: v1(62.992,29.337) 68.961,29.337 JAPORT.1
NetJAPORT_2: JAPORT.2 U1.22 | length 12.3
  Top Layer w0.254: 72.644,32.639 72.517,32.766 72.517,33.579 74.03,33.579 74.639,34.188 74.639,34.623 76.022,36.006 76.022,38.656 76.474,39.108 U1.22
  Top Layer w0.508: JAPORT.2 72.644,32.639
NetJAPORT_3: JAPORT.3 U1.27 | length 12.1
  Top Layer w0.254: 75.184,32.639 76.581,32.639 79.019,35.077 79.019,39.356 78.974,39.401 U1.27
  Top Layer w0.508: JAPORT.3 75.184,32.639
NetJAPORT_4: JAPORT.4 U1.28 | length 10.8
  Top Layer w0.254: 77.724,32.639 78.359,32.639 79.477,33.757 79.477,40.192 U1.28
  Top Layer w0.508: JAPORT.4 77.724,32.639
NetJFPORT_1: JFPORT.1 U1.17 | length 19.8
  Top Layer w0.254: 65.532,35.966 65.647,35.966 70.19,40.509 73.66,40.509 U1.17
  Top Layer w0.508: JFPORT.1 62.611,30.48 62.611,32.014 64.033,33.437 64.033,35.225 64.775,35.966 65.532,35.966
NetJFPORT_2: JFPORT.2 U1.16 | length 16.5
  Top Layer w0.254: 65.532,36.678 65.647,36.678 70.939,41.97 U1.16
  Top Layer w0.508: JFPORT.2 62.611,33.02 62.611,34.554 63.322,35.265 63.322,35.519 64.48,36.678 65.532,36.678
NetJFPORT_3: JFPORT.3 U1.15 | length 14.8
  Top Layer w0.254: 65.532,37.389 65.647,37.389 70.728,42.47 U1.15
  Top Layer w0.508: JFPORT.3 62.611,35.56 62.611,35.814 64.186,37.389 65.532,37.389
NetJFPORT_4: JFPORT.4 U1.14 | length 13.8
  Top Layer w0.254: 65.532,38.1 65.647,38.1 70.517,42.97 U1.14
  Top Layer w0.508: JFPORT.4 65.532,38.1
NetJFPORT_5: JFPORT.5 U1.13 | length 14.6
  Top Layer w0.254: 65.532,38.811 65.647,38.811 70.306,43.47 U1.13
  Top Layer w0.508: JFPORT.5 62.611,40.64 62.611,40.386 64.186,38.811 65.532,38.811
NetJFPORT_6: JFPORT.6 U1.12 | length 16.2
  Top Layer w0.254: 65.532,39.522 65.597,39.522 70.044,43.97 U1.12
  Top Layer w0.508: JFPORT.6 62.611,43.18 62.611,41.646 63.322,40.935 63.322,40.681 64.48,39.522 65.532,39.522
NetLED1_1: LED1.1 R6.2 | length 3.1
  Top Layer w0.254: LED1.1 92.24,33.578 R6.2
NetP_M1_1: P_M1.1 U1.63 U_4427.2 | length 25.9
  Top Layer w0.254: 60.731,62.636 60.833,62.738 U_4427.2 ; 71.12,52.959 73.914,52.959 74.041,53.086 74.474,52.653 U1.63
  Top Layer w0.508: 60.731,62.636 68.936,62.636 69.139,62.433 69.139,59.995 P_M1.1 69.088,54.991 71.12,52.959
NetP_M1_2: P_M1.2 U1.62 U_4427.4 | length 23.7
  Top Layer w0.254: 71.882,53.721 74.053,53.721 74.931,52.842 74.931,51.288 U1.62
  Top Layer w0.508: U_4427.4 64.219,63.81 71.425,63.81 71.628,63.607 P_M1.2 71.882,59.69 71.882,53.721
NetP_M1_3: P_M1.3 U1.61 | length 9.7
  Top Layer w0.254: 73.66,54.737 74.219,54.178 74.242,54.178 75.474,52.946 U1.61
  Top Layer w0.508: 73.66,54.737 73.66,59.436 P_M1.3
NetP_M1_4: P_M1.4 U1.60 | length 10.1
  Top Layer w0.254: 74.676,54.737 75.974,53.439 U1.60
  Top Layer w0.508: 74.676,54.737 74.676,57.912 P_M1.4
NetP_M1_5: P_M1.5 U1.59 | length 11.2
  Top Layer w0.254: 75.565,55.372 75.565,54.495 76.431,53.628 76.431,51.288 U1.59
  Top Layer w0.508: 75.565,55.372 75.565,57.277 76.454,58.166 77.47,58.166 P_M1.5
NetP_M1_6: P_M1.6 U1.58 | length 12.8
  Top Layer w0.254: 76.2,54.737 76.974,53.963 U1.58
  Top Layer w0.508: 76.2,54.737 76.276,54.813 76.276,56.982 76.749,57.455 78.466,57.455 80.955,59.944 P_M1.6
NetP_M1_7: P_M1.7 U1.44 | length 16.6
  Top Layer w0.254: U1.44 85.443,47.47 v1(87.249,49.276)
  Bottom Layer w0.508: P_M1.7 84.328,52.197 v1(87.249,49.276)
NetP_M1_8: P_M1.8 U1.43 | length 19.7
  Top Layer w0.254: U1.43 86.245,46.97 87.103,47.828 87.903,47.828 88.122,47.609 88.265,47.752 88.265,50.419 v1(89.916,52.07)
  Bottom Layer w0.508: P_M1.8 86.792,59.868 86.792,55.194 v1(89.916,52.07)
NetP_M2_1: P_M2.1 U1.8 | length 25.9
  Top Layer w0.254: 58.928,37.084 58.928,44.45 61.087,46.609 66.441,46.609 66.493,46.558 67.139,46.558 67.684,46.013 72.156,46.013 U1.8 U1.8@72.195,45.974
  Top Layer w0.508: P_M2.1 58.928,37.084
NetP_M2_2: P_M2.2 U1.6 | length 25.5
  Top Layer w0.254: 66.04,47.371 66.326,47.371 66.682,47.015 66.726,47.015 66.726,47.771 67.291,48.336 68.091,48.336 68.656,47.771 68.656,47.052 68.739,46.97 U1.6
  Top Layer w0.508: P_M2.2 58.166,39.624 58.344,39.802 58.344,44.692 61.023,47.371 66.04,47.371
NetP_M2_3: P_M2.3 U1.5 | length 25.3
  Top Layer w0.254: 65.532,48.26 66.568,48.26 67.102,48.793 68.28,48.793 69.113,47.96 69.113,47.6 69.241,47.472 ; 69.241,47.472 72.199,47.472 69.241,47.472
  Top Layer w0.508: P_M2.3 57.404,42.164 57.633,42.393 57.633,44.987 60.906,48.26 65.532,48.26
NetP_M2_4: P_M2.4 U1.4 | length 19.8
  Top Layer w0.254: 65.405,49.022 65.634,49.251 68.47,49.251 69.571,48.15 69.571,48.031 69.632,47.97 U1.4
  Top Layer w0.508: P_M2.4 56.344,44.704 60.611,48.971 65.354,48.971 65.405,49.022
NetP_M2_5: P_M2.5 U1.3 | length 18.9
  Top Layer w0.254: 65.151,49.784 68.583,49.784 69.897,48.47 U1.3
  Top Layer w0.508: P_M2.5 57.878,47.244 60.317,49.682 65.049,49.682 65.151,49.784
NetP_M2_6: P_M2.6 U1.2 | length 20.6
  Top Layer w0.254: 67.691,50.546 67.996,50.241 68.772,50.241 70.041,48.972 ; 70.041,48.972 U1.2 70.041,48.972
  Top Layer w0.508: P_M2.6 59.413,49.784 60.124,50.495 65.446,50.495 65.573,50.368 67.513,50.368 67.691,50.546
NetP_M2_7: P_M2.7 U1.1 | length 19
  Top Layer w0.254: 66.802,51.308 68.58,51.308 70.418,49.47 U1.1
  Top Layer w0.508: P_M2.7 56.769,52.324 58.293,50.8 59.423,50.8 59.829,51.206 65.74,51.206 65.867,51.079 66.573,51.079 66.802,51.308
NetP_M2_8: P_M2.8 U1.64 | length 21.3
  Top Layer w0.254: 70.358,50.546 73.275,50.546 U1.64
  Top Layer w0.508: P_M2.8 55.626,54.864 58.547,51.943 66.431,51.943 66.507,52.019 68.885,52.019 70.358,50.546
NetP_SPI1_1: P_SPI1.1 U1.11 | length 45.9
  Top Layer w0.254: 68.326,43.688 69.108,44.47 U1.11
  Top Layer w0.508: v1(65.024,40.64) 68.072,43.688 68.326,43.688
  Bottom Layer w0.508: v1(65.024,40.64) 67.183,38.481 85.09,38.481 89.279,34.292 89.279,32.243 89.814,31.708 89.814,30.48 P_SPI1.1
NetP_SPI1_3: P_SPI1.3 U1.34 | length 16.6
  Top Layer w0.254: U1.34 84.288,42.47 87.438,39.319 91.163,39.319 92.839,37.643 93.675,37.643 94.107,37.211 94.107,35.56
  Top Layer w0.508: 94.107,35.56 P_SPI1.3
NetP_SPI1_4: P_SPI1.4 U1.35 | length 14.8
  Top Layer w0.254: U1.35 84.434,42.97 87.628,39.776 91.352,39.776 93.029,38.1 94.107,38.1
  Top Layer w0.508: 94.107,38.1 P_SPI1.4
NetP_SPI1_5: P_SPI1.5 U1.36 | length 16.6
  Top Layer w0.254: U1.36 84.581,43.47 87.817,40.234 91.542,40.234 93.218,38.557 93.675,38.557 94.107,38.989 94.107,40.64
  Top Layer w0.508: 94.107,40.64 P_SPI1.5
NetR2_2: R2.2 U1.53 | length 5.1
  Top Layer w0.254: R2.2 77.94,53.327 77.978,53.289 78.105,53.416 79.056,53.416 79.431,53.041 79.431,51.288 U1.53
NetR6_1: R6.1 U1.33 | length 9.9
  Top Layer w0.254: U1.33 85.468,39.751 86.36,39.751 87.249,38.862 88.773,38.862 90.64,36.995 R6.1
pads on no net: ICD.6 J1.4 J1.5 J1.6 J1.MH3 J1.MH4 Q1.4 U_4427.1 U_4427.8

## Keep-outs
Keep-Out Layer:
  lines w0.254: 52.07,97.79 105.74,97.79 ; 52.07,97.815 52.07,27.178 105.816,27.178 ; 105.842,27.178 105.842,97.79

## Text inside footprints (layer, text, board x,y; h text height)
C33: Top Overlay "+" at 76.569,85.078 h1.5 r180
C60: Top Overlay "+" at 75.045,73.902 h1.5 r180
JPWR: Mechanical 1 "Alert PCB fab to slot details" at 64.994,97.25 h0.3 r270; Mechanical 1 "Assign keep-out area to slot" at 65.494,97.25 h0.3 r270; Mechanical 1 "Mech 1 - Slot cut-out" at 64.494,97.25 h0.3 r270; Mechanical 1 "Mech 2 - Clearance, move to internal plane if present" at 63.994,97.25 h0.3 r270
Q11: Top Overlay "3" at 80.272,82.685 h1.5; Top Overlay "2" at 82.812,82.685 h1.5; Top Overlay "1" at 77.982,82.685 h1.5